# Altium PCB PCB1.PcbDoc
Units mil, origin at the board's own origin, x right, y up, seen from the top; angles counter-clockwise.
Board outline 6000 x 4000 mil, 2 copper layers (Top Layer, Bottom Layer); 46 components, 48 nets, 332 pads, 0 vias.
Unrouted connection lines stored in the file: 133.
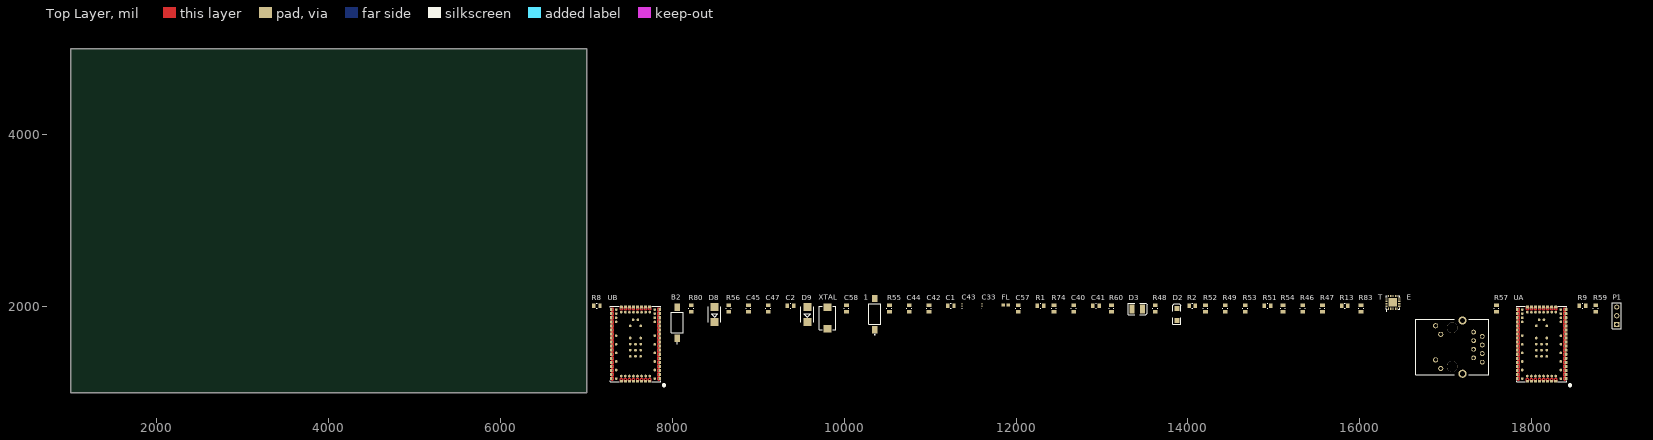
[diagram p0: Top Layer view]
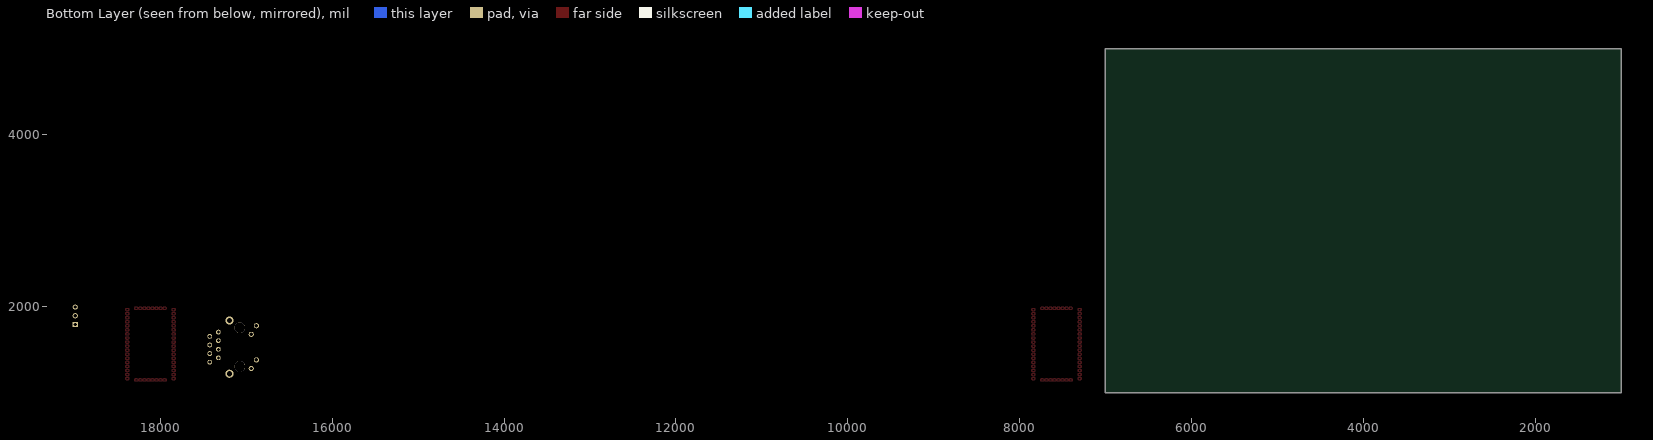
[diagram p1: Bottom Layer view, seen from below]

## Layer stack, top to bottom
Top Solder: solder mask 0.4, Solder Resist, Dk 3.5
Top Layer: signal copper 1.4
Dielectric 1: dielectric 12.6, FR-4, Dk 4.8
Bottom Layer: signal copper 1.4
Bottom Solder: solder mask 0.4, Solder Resist, Dk 3.5

## Board outline
1000,1000 7000,1000 7000,5000 1000,5000

## Design rules (kind name [scope] priority, off if disabled: settings)
Clearance [All] p1: gap=10 ignorepadtopadclearanceinfootprint=FALSE except(0: Arc-Hole Track-Hole SMDPad-Hole THPad-Hole Via-Hole Fill-Hole Poly-Hole Region-Hole Text-Hole)
PolygonConnect [All] p1: connectstyle=Relief reliefconductorwidth=10 reliefentries=4 polygonreliefangle="90 Angle" airgapwidth=10
RoomDefinition Ublox_breakout [InComponentClass('Ublox_breakout')] p1: confinementstyle=ConfineIn formatcopy=TRUE lockcomponents=FALSE outline 7045,1055 19050,1055 19050,2155 7045,2155
RoutingVias [All] p1: holewidth=28 width=50 viastyle="Through Hole" minholewidth=28 minwidth=50 maxholewidth=28 maxwidth=50
SolderMaskExpansion [All] p1: expansion=4 istentingtop=FALSE
Width [All] p1: maxlimit=10 minlimit=10 preferedwidth=10
30 further rules are at their usual default settings.

## Components (designator, comment, footprint, x,y, rotation, side; value= is the part's Value field where it differs from the comment)
1 "push button" TECO-FSMSM 10355,1915 r90 top
B2 "push button" TECO-FSMSM 8055,1815 r90 top
C1 "22uF 10V" 0805 11240,2010 r0 top value=22uF
C2 "22uF 10V" 0805 9375,2010 r0 top value=22uF
C33 "2.2uF" 0603 11600,2020 r90 top
C40 "100nF 50V" 0805 12670,1980 r90 top value=100nF
C41 "100nF 50V" 0805 12930,2010 r0 top value=100nF
C42 "100nF 50V" 0805 10985,1980 r90 top value=100nF
C43 "2.2uF" 0603 11370,2020 r90 top
C44 "100nF 50V" 0805 10755,1980 r90 top value=100nF
C45 "100nF 50V" 0805 8885,1980 r90 top value=100nF
C47 "100nF 50V" 0805 9115,1980 r90 top value=100nF
C57 "100nF 50V" 0805 12025,1980 r90 top value=100nF
C58 "100nF 50V" 0805 10025,1980 r90 top value=100nF
D2 "LED2" 3.2X1.6X1.1 13870,1910 r90 top
D3 "LED3" 3.5X2.8X1.9 13410,1975 r0 top
D8 "SD560BTR" DO-214AA 8490,1910 r90 top
D9 "SD560BTR" DO-214AA 9570,1910 r90 top
E "RJ45" *RJ45_PULSEJACK 17075,1530 r90 top
FL "BLM18PG300SN1D" BEADC1608X95N 11880,2020 r0 top
P1 "Header 3" HDR1X3 18990,1795 r90 top
R1 "270" 0805 12285,2010 r0 top
R2 "270" 0805 14050,2010 r0 top
R8 "JUMPER" 0805 7120,2010 r0 top value=0
R9 "120" 0805 18590,2010 r0 top
R13 "1k" 0805 15825,2010 r0 top
R46 "10.0" 0805 15335,1980 r90 top
R47 "10.0" 0805 15565,1980 r90 top
R48 "10.0" 0805 13620,1980 r90 top
R49 "10.0" 0805 14435,1980 r90 top
R51 "10.0" 0805 14925,2010 r0 top
R52 "10.0" 0805 14205,1980 r90 top
R53 "10.0" 0805 14665,1980 r90 top
R54 "10.0" 0805 15105,1980 r90 top
R55 "1k" 0805 10525,1980 r90 top
R56 "1k" 0805 8655,1980 r90 top
R57 "1k" 0805 17590,1980 r90 top
R59 "1k" 0805 18745,1980 r90 top
R60 "6.8k" 0805 13110,1980 r90 top
R74 "16m" 0805 12440,1980 r90 top
R80 "JUMPER" 0805 8220,1980 r90 top value=0
R83 "4.7" 0805 16015,1980 r90 top
T "KSZ8081RNAIA-TR" QFN50P400X400X90-25N 16385,2050 r90 top
UA "ODIN-W262" ODIN-W262 18115,1565 r90 top
UB "ODIN-W262" ODIN-W262 7570,1565 r90 top
XTAL "CRYSTAL 25.0000MHZ 8PF SMD" SMD-2 9805,1870 r90 top

## Footprints (in the part's own frame and the unit in brackets; to place one, negate y for a bottom-side part, rotate by r counter-clockwise, add the part's x,y. Pads: shape width x height; smd on the part's side, far side on the other; paste and mask are expansions set on the pad)
3.2X1.6X1.1 [mm]
  rect 1.5x1.5 smd: 1(-1.75,0) 2(1.75,0)
  silkscreen extent -2.9,-1.15 3.2,1.15
3.5X2.8X1.9 [mm] "SM LED; 2 C-Bend Leads; Body 3.5 x 2.8 x 1.9 mm, inc leads (LxWxH typ)"
  rect 1.5x2.6 smd: 1(-1.5,0) 2(1.5,0)
  silkscreen extent -2.65,-1.7 2.95,1.7
0603 [mm] "Chip Inductor, Body 0.6x0.3mm, IPC High Density"
  rect 0.5x0.3 smd: 1(-0.35,0) 2(0.35,0)
  silkscreen extent -0.9,-0.05 -0.9,0.05, body extent -0.33,-0.18 0.33,0.18, height 0.55
0805 [mil]
  rect 40x55 smd: 1(-37,0) 2(37,0)
  silkscreen extent -4,-28 4,28
*RJ45_PULSEJACK [mm]
  round 1.408 hole 0.9: 1(4.445,-6.35) 2(3.175,-8.89) 3(1.905,-6.35) 4(0.635,-8.89) 5(-0.635,-6.35) 6(-1.905,-8.89) 7(-3.175,-6.35) 8(-4.445,-8.89)
  round 1.508 hole 1: 9(6.325,4.9) 10(3.785,3.38) 11(-3.785,4.9) 12(-6.325,3.38)
  round 3.2 hole 3.2 unplated: None(-5.715,0) None(5.715,0)
  round 2.4 hole 1.6: P$5(-7.875,-3.05) P$6(7.875,-3.05)
  silkscreen extent -8.13,-10.8 8.2,10.79
BEADC1608X95N [mm]
  rect 1x0.97 smd: 1(-0.735,0) 2(0.735,0)
DO-214AA [mm]
  rect 2.4x2.4 smd: A(2.2,0) C(-2.2,0)
  silkscreen extent -2.26,-1.91 2.26,1.91
HDR1X3 [mm] "Connector; Header; 3 Position"
  rect 1.5x1.5 hole 0.9: 1(0,0)
  round 1.5 hole 0.9: 2(2.54,0) 3(5.08,0)
  silkscreen extent -1.27,-1.27 6.35,1.27
ODIN-W262 [mm]
  round 0.8 smd: 1(6.6,-5.7) 2(7.8,-5.7) 3(9,-5.7) 4(10.2,-5.7) 5(9.45,-4.2) 6(9.45,-3) 7(9.45,-1.8) 8(9.45,-0.6) 9(9.45,0.6) 10(9.45,1.8) 11(9.45,3) 12(9.45,4.2) 13(10.2,5.7) 14(9,5.7) 15(7.8,5.7) 16(6.6,5.7) 17(-9.45,4.2) 18(-9.45,3) 19(-9.45,1.8) 20(-9.45,0.6) 21(-9.45,-0.6) 22(-9.45,-1.8) 23(-9.45,-3) 24(-9.45,-4.2) 25(-3.6,-1.54) 26(-1.8,-1.54) 27(0,-1.54) 28(1.8,-1.54) 29(5.4,-1.54) 30(7.2,-0.7) 31(-3.6,0) 32(-1.8,0) 33(0,0) 34(-3.6,1.54) 35(-1.8,1.54) 36(0,1.54) 37(1.8,1.54) 38(5.4,1.54) 39(7.2,0.7) TP1(2.49,-5.7) TP2(2.49,5.7) TP3(-0.05,-5.7) TP4(-0.05,5.7) TP5(-2.59,-5.7) TP6(-2.59,5.7) TP7(-5.13,-5.7) TP8(-5.13,5.7) TP9(-7.67,-5.7) TP10(-7.67,5.7) TP11(-10.21,-5.7) TP12(-10.21,5.7)
  rrect15% 0.9x0.75 smd paste-1 mask+0: A1(-10.2,-7.225) A2(-9,-7.225) A3(-7.8,-7.225) A4(-6.6,-7.225) A5(-5.4,-7.225) A6(-4.2,-7.225) A7(-3,-7.225) A8(-1.8,-7.225) A9(-0.6,-7.225) A10(0.6,-7.225) A11(1.8,-7.225) A12(3,-7.225) A13(4.2,-7.225) A14(5.4,-7.225) A15(6.6,-7.225) A16(7.8,-7.225) A17(9,-7.225) A18(10.2,-7.225) C1(10.2,7.225) C2(9,7.225) C3(7.8,7.225) C4(6.6,7.225) C5(5.4,7.225) C6(4.2,7.225) C7(3,7.225) C8(1.8,7.225) C9(0.6,7.225) C10(-0.6,7.225) C11(-1.8,7.225) C12(-3,7.225) C13(-4.2,7.225) C14(-5.4,7.225) C15(-6.6,7.225) C16(-7.8,7.225) C17(-9,7.225) C18(-10.2,7.225)
  rrect15% 0.75x0.9 smd paste-1 mask+0: B1(10.975,-4.2) B2(10.975,-3) B3(10.975,-1.8) B4(10.975,-0.6) B5(10.975,0.6) B6(10.975,1.8) B7(10.975,3) B8(10.975,4.2) D1(-10.975,4.2) D2(-10.975,3) D3(-10.975,1.8) D4(-10.975,0.6) D5(-10.975,-0.6) D6(-10.975,-1.8) D7(-10.975,-3) D8(-10.975,-4.2)
  Top Layer circle w0: c-3,-6.85 r0.45
  Top Layer circle w0: c-1.8,-6.85 r0.45
  Top Layer circle w0: c-0.6,-6.85 r0.45
  Top Layer circle w0: c0.6,-6.85 r0.45
  Top Layer circle w0: c1.8,-6.85 r0.45
  Top Layer circle w0: c3,-6.85 r0.45
  Top Layer circle w0: c4.2,-6.85 r0.45
  Top Layer circle w0: c5.4,-6.85 r0.45
  Top Layer circle w0: c6.6,-6.85 r0.45
  Top Layer circle w0: c7.8,-6.85 r0.45
  Top Layer circle w0: c9,-6.85 r0.45
  Top Layer circle w0: c10.2,-6.85 r0.45
  Top Layer circle w0: c-10.2,-6.85 r0.45
  Top Layer circle w0: c-9,-6.85 r0.45
  Top Layer circle w0: c-7.8,-6.85 r0.45
  Top Layer circle w0: c-6.6,-6.85 r0.45
  Top Layer circle w0: c-5.4,-6.85 r0.45
  Top Layer circle w0: c-4.2,-6.85 r0.45
  Top Layer circle w0: c3,6.85 r0.45
  Top Layer circle w0: c1.8,6.85 r0.45
  Top Layer circle w0: c0.6,6.85 r0.45
  Top Layer circle w0: c-0.6,6.85 r0.45
  Top Layer circle w0: c-1.8,6.85 r0.45
  Top Layer circle w0: c-3,6.85 r0.45
  Top Layer circle w0: c-4.2,6.85 r0.45
  Top Layer circle w0: c-5.4,6.85 r0.45
  Top Layer circle w0: c-6.6,6.85 r0.45
  Top Layer circle w0: c-7.8,6.85 r0.45
  Top Layer circle w0: c-9,6.85 r0.45
  Top Layer circle w0: c-10.2,6.85 r0.45
  Top Layer circle w0: c10.2,6.85 r0.45
  Top Layer circle w0: c9,6.85 r0.45
  Top Layer circle w0: c7.8,6.85 r0.45
  Top Layer circle w0: c6.6,6.85 r0.45
  Top Layer circle w0: c5.4,6.85 r0.45
  Top Layer circle w0: c4.2,6.85 r0.45
  Top Layer circle w0: c-10.6,4.2 r0.45
  Top Layer circle w0: c-10.6,3 r0.45
  Top Layer circle w0: c-10.6,1.8 r0.45
  Top Layer circle w0: c-10.6,0.6 r0.45
  Top Layer circle w0: c-10.6,-0.6 r0.45
  Top Layer circle w0: c-10.6,-1.8 r0.45
  Top Layer circle w0: c-10.6,-3 r0.45
  Top Layer circle w0: c-10.6,-4.2 r0.45
  Top Layer circle w0: c10.6,-4.2 r0.45
  Top Layer circle w0: c10.6,-3 r0.45
  Top Layer circle w0: c10.6,-1.8 r0.45
  Top Layer circle w0: c10.6,-0.6 r0.45
  Top Layer circle w0: c10.6,0.6 r0.45
  Top Layer circle w0: c10.6,1.8 r0.45
  Top Layer circle w0: c10.6,3 r0.45
  Top Layer circle w0: c10.6,4.2 r0.45
  silkscreen extent -12.4,-8.65 11.15,7.4, body extent -11.15,-7.4 11.15,7.4, height 4.8
QFN50P400X400X90-25N [mm]
  rrect70% 0.71x0.27 smd: 1(-1.9,1.25) 2(-1.9,0.75) 3(-1.9,0.25) 4(-1.9,-0.25) 5(-1.9,-0.75) 6(-1.9,-1.25) 13(1.9,-1.25) 14(1.9,-0.75) 15(1.9,-0.25) 16(1.9,0.25) 17(1.9,0.75) 18(1.9,1.25)
  rrect70% 0.27x0.71 smd: 7(-1.25,-1.9) 8(-0.75,-1.9) 9(-0.25,-1.9) 10(0.25,-1.9) 11(0.75,-1.9) 12(1.25,-1.9) 19(1.25,1.9) 20(0.75,1.9) 21(0.25,1.9) 22(-0.25,1.9) 23(-0.75,1.9) 24(-1.25,1.9)
  rect 2.5x2.5 smd paste-2: 25(0,0)
  silkscreen extent -2.55,-2 2,2
SMD-2 [mm]
  rect 2.2x2.4 smd: 1(-3.15,0) 2(3.15,0)
  silkscreen extent -3.5,-2.5 3.5,2.5
TECO-FSMSM [mm]
  rect 2.19x1.6 smd: 1(-4.59,0) 2(4.59,0)
  silkscreen extent -6.2,-1.75 3,1.75

## Part data
1 B2: library part Teco-FSMSM
C1 C2: library part "CAP 22uF 10V", "CAP CER 2.2UF 10V X5R 0805", Operating Temperature="-55°C ~ 85°C", Package=0805, Rating=10V, Temperature Coefficient=X5R, Tolerance=20%
C33 C43: library part "CAP 2.2uF 6.3V", "CAP CER 2.2UF 6.3V X5R 0603/0805", Operating Temperature="-55°C ~ 85°C", Package=0603/0805, Rating=6.3V, Temperature Coefficient=X5R, Tolerance=10%
C40 C41 C42 C44 C45 C47 C57 C58: library part "CAP 100nF 50V", "CAP CER 0.1UF 50V X7R 0805", Package=0805, Rating=50V, Tolerance=10%
D2: library part "LED RED SMD", "Typical RED, GREEN, YELLOW, AMBER GaAs LED", Color=Red, Current - Test=20mA, Lens Color=Colorless, Package=1206, Voltage - Forward (Vf) (Typ)=1.7V, Lens Transparency=Clear
D3: "Typical BLUE SiC LED", DatasheetVersion=16-Apr-2002, LatestRevisionDate=17-Dec-2003, LatestRevisionNote="PCB Footprint replaced.", PackageDescription="SM LED; 2 C-Bend Leads; Body 3.5 x 2.8 x 1.9 mm, inc leads (LxWxH typ)", PackageReference=3.5X2.8X1.9, PackageVersion=16-Apr-2002, Published=8-Jun-2000, Publisher="Altium Limited"
D8 D9: library part "DIODE STANDARD 600V 5A", "Diode Standard 600V 5A Surface Mount SMB", Supplier Part Number 1=1655-1530-1-ND, Supplier 1=Digi-Key
E: "Jack Modular Connector 8p8c (RJ45, Ethernet) 90Â° Angle (Right) Unshielded", Package=None, Availability=Unavailable, Check_prices=https://www.snapeda.com/parts/RJ45/Bulgin/view-part/55901/?ref=eda, MF=Bulgin, MP=RJ45, Price=None, SnapEDA_Link=https://www.snapeda.com/parts/RJ45/Bulgin/view-part/55901/?ref=snap
FL: "30 Ohms @ 100MHz 1 Power Line Ferrite Bead 0603 _1608 Metric_ 1A 50mOhm", Package="1608 Murata", Availability=Unavailable, MF=Murata, MP=BLM18PG300SN1D, Price=None, SnapEDA_Link=https://www.snapeda.com/parts/BLM18PG300SN1D/Murata/view-part/270173/?ref=snap
P1: "Header, 3-Pin", LatestRevisionDate=17-Jul-2002, LatestRevisionNote="Re-released for DXP Platform.", Publisher="Altium Limited"
R1 R2: library part "RES 270 1/8W", "RES SMD 270 OHM 5% 1/8W 0805", Package=0805, Power (Watts)=0.125W, Tolerance=5%
R8 R80: library part "RES 0 JUMPER", "RES SMD 0 OHM JUMPER GENERIC 0805", Package=0805
R9: library part "RES 120.0 1/8W", "RES SMD 120 OHM 5% 1/8W 0805", Package=0805, Power (Watts)=0.125W, Tolerance=5%
R13 R55 R56 R57 R59: library part "RES 1k 1/8W", "RES SMD 1K OHM 5% 1/8W 0805", Package=0805, Power (Watts)=0.125W, Tolerance=5%
R46 R47 R48 R49 R51 R52 R53 R54: library part "RES 10.0 1/8W - 5%", "RES SMD 10.0 OHM 5% 1/8W 0805", Package=0805, Power (Watts)=0.125W, Tolerance=5%
R60: library part "RES 6.8k 1/8W", "RES SMD 6.8K OHM 5% 1/8W 0805", Package=0805, Power (Watts)=0.125W, Tolerance=5%
R74: library part "RES 16m 1/2W", "RES SMD 0.016 OHM 1% 1/2W 0805 Thick Film", Case Code (Imperial)=0805, Case Code (Metric)=2012, Manufacturer=Panasonic, Manufacturer Part Number=ERJ-6BWFR016V, Max Operating Temperature=155°C, Max Power Dissipation=500mW, Min Operating Temperature=-55°C, Package Quantity=1, Resistance=16mR, Supplier Part Number 1=P.016AQCT-ND, Temperature Coefficient=200ppm/°C, Tolerance=1%, Case/Package=0805, Category="Chip SMD Resistors", ComponentLink1Description=https://datasheet.ciiva.com/11808/0900766b8126441d-11808690.pdf?src-supplier=RSComponents, ComponentLink1URL=https://datasheet.ciiva.com/11808/0900766b8126441d-11808690.pdf?src-supplier=RSComponents, ComponentLink2Description=https://datasheet.ciiva.com/2452/aoa0000ce3-2452594.pdf?src-supplier=Digi-Key, ComponentLink2URL=https://datasheet.ciiva.com/2452/aoa0000ce3-2452594.pdf?src-supplier=Digi-Key, ComponentLink3Description=https://datasheet.ciiva.com/2452/aoa0000ce3-2452592.pdf?src-supplier=Digi-Key, ComponentLink3URL=https://datasheet.ciiva.com/2452/aoa0000ce3-2452592.pdf?src-supplier=Digi-Key, ComponentLink4Description=https://datasheet.ciiva.com/2452/aoa0000ce3-2452593.pdf?src-supplier=Digi-Key, ComponentLink4URL=https://datasheet.ciiva.com/2452/aoa0000ce3-2452593.pdf?src-supplier=Digi-Key, ComponentLink5Description=https://datasheet.ciiva.com/9192/aoa0000ce3-9192761.pdf?src-supplier=Avnet, ComponentLink5URL=https://datasheet.ciiva.com/9192/aoa0000ce3-9192761.pdf?src-supplier=Avnet, ComponentLink6Description=https://datasheet.ciiva.com/17211/aoa0000ce3-17211370.pdf?src-supplier=Avnet+Europe, ComponentLink6URL=https://datasheet.ciiva.com/17211/aoa0000ce3-17211370.pdf?src-supplier=Avnet+Europe, Composition="Thick Film", Contact Plating=Tin, Depth=1.25mm, Features="Automotive AEC-Q200", Height=0.028inch, Lead Free="Lead Free", Length=2mm, Military Standard=Not, Mount="Surface Mount", Number of Pins=2, Number of Terminations=2, Packaging="Tape and Reel", Power Rating=500mW, Pricing 1="1=0.65000, 10=0.53800, 100=0.36140, 1000=0.21148, 2500=0.20917 (USD)", Radiation Hardening=No, RoHS=Yes, Stock 1=4585, Supplier 1=Digi-Key, Termination=SMD/SMT, Width=0.049inch
R83: library part "RES 4.7 1/8W", "RES SMD 4.7 OHM 5% 1/8W 0805", Package=0805, Power (Watts)=0.125W, Tolerance=5%
T: "1/1 Transceiver Full RMII 24-QFN _4x4_", Package="QFN-24 Microchip", Availability=Unavailable, MF=Microchip, MP=KSZ8081RNAIA-TR, Price=None, SnapEDA_Link=https://www.snapeda.com/parts/KSZ8081RNAIA-TR/Microchip/view-part/482545/?ref=snap
XTAL: library part "XTAL 25MHZ 8PF SMD", "25MHz ±50ppm Crystal 8pF 70 Ohms 2-SMD, No Lead", Frequency=25MHz, Load Capacitance=8pF, Package="2-SMD, No Lead", Supplier Part Number 1=644-1041-1-ND, Digikey=644-1041-1-ND, Digikey Link=https://www.digikey.ca/product-detail/en/ndk-america-inc/NX5032GA-25.000000MHZ-LN-CD-1/644-1041-1-ND/1128913, ESR="70 Ohms", MF="NDK America, Inc.", MP=NX5032GA-25.000000MHZ-LN-CD-1, Price="0.95 CAD", Supplier 1=Digi-Key

## Nets (pads, with @x,y where several pads share a name; then routed paths per layer and width w, separated by ;. In a path a pad name is that pad's centre, name@x,y a point inside that pad or via, vN(x,y) a via of type N, cw(c..) or ccw(c..) an arc to the next point about the centre after c; other vN are vias at no path point)
1v8: C33.1 C42.2 D9.C R13.2 R55.2 R59.1 T.14
3.3V: UB.A4
3v3: C41.2 E.6 E.9 FL.2 R57.1 R83.1
BlueLED: D3.1 UA.A9
ETH_CRSDV: R54.2 R57.2 UA.D4
ETH_MC: R46.1 T.11
ETH_MDIO: R47.1 R83.2 T.10
ETH_REFCLK: T.16 UA.D8
ETH_RST_N: D8.C R8.1 R80.1
ETH_RXD0: R52.2 UA.D5
ETH_RXD1: R53.2 UA.D6
ETH_TXD0: R49.1 UA.D1
ETH_TXD1: R51.1 UA.D2
ETH_TXEN: R48.1 UA.D3
GND: 1.2 B2.2 C1.2 C2.2 C33.2 C40.1 C41.1 C42.1 C43.2 C44.1 C45.1 C47.1 C57.2 C58.2 R1.1 R2.1 R8.2 R56.2 R60.1 R74.1 T.22 T.25 UA.A10 UB.1 UB.2 UB.3 UB.4 UB.5 UB.6 UB.7 UB.8 UB.9 UB.10 UB.11 UB.12 UB.13 UB.14 UB.15 UB.16 UB.17 UB.18 UB.19 UB.20 UB.21 UB.22 UB.23 UB.24 UB.25 UB.26 UB.27 UB.28 UB.29 UB.30 UB.31 UB.32 UB.33 UB.34 UB.35 UB.36 UB.37 UB.38 UB.39 UB.A3 UB.C1 UB.C3 UB.C4 UB.C7 UB.D7
MAIN_RESET: P1.1 R80.2 UA.A1
NetC2_1: C2.1 T.8
NetC40_2: C40.2 E.3
NetC43_1: C43.1 C44.2 FL.1 T.2
NetC45_2: C45.2 C47.2 T.1
NetC57_1: C57.1 C58.1 E.4 E.5 R74.2
NetD2_1: D2.1 UA.A8
NetD2_2: D2.2 R2.2
NetD3_2: D3.2 R1.2
NetD8_A: D8.A D9.A R55.1 T.24
NetE_10: E.10 R9.1
NetP1_2: P1.2 UA.A13
NetR9_2: R9.2
NetR13_1: R13.1 T.18
NetR46_2: R46.2 UA.C14
NetR47_2: R47.2 UA.C15
NetR48_2: R48.2 T.19
NetR49_2: R49.2 T.20
NetR51_2: R51.2 T.21
NetR52_1: R52.1 T.13
NetR53_1: R53.1 T.12
NetR54_1: R54.1 T.15
NetR56_1: R56.1 T.17
NetR60_2: R60.2 T.9
NetT_7: T.7 XTAL.2
PHY_LED0: R59.2 T.23
PHY_RXN: E.8 T.3
PHY_RXP: E.7 T.4
PHY_TXN: E.2 T.5
PHY_TXP: E.1 T.6
RedLED: 1.1 UA.A7
SWITCH0: B2.1 UA.A6
UART_TXD: P1.3 UA.A11
pads on no net: C1.1 E.11 E.12 E.None E.P$5 E.P$6 UA.1 UA.2 UA.3 UA.4 UA.5 UA.6 UA.7 UA.8 UA.9 UA.10 UA.11 UA.12 UA.13 UA.14 UA.15 UA.16 UA.17 UA.18 UA.19 UA.20 UA.21 UA.22 UA.23 UA.24 UA.25 UA.26 UA.27 UA.28 UA.29 UA.30 UA.31 UA.32 UA.33 UA.34 UA.35 UA.36 UA.37 UA.38 UA.39 UA.A2 UA.A3 UA.A4 UA.A5 UA.A12 UA.A14 UA.A15 UA.A16 UA.A17 UA.A18 UA.B1 UA.B2 UA.B3 UA.B4 UA.B5 UA.B6 UA.B7 UA.B8 UA.C1 UA.C2 UA.C3 UA.C4 UA.C5 UA.C6 UA.C7 UA.C8 UA.C9 UA.C10 UA.C11 UA.C12 UA.C13 UA.C16 UA.C17 UA.C18 UA.D7 UA.TP1 UA.TP2 UA.TP3 UA.TP4 UA.TP5 UA.TP6 UA.TP7 UA.TP8 UA.TP9 UA.TP10 UA.TP11 UA.TP12 UB.A1 UB.A2 UB.A5 UB.A6 UB.A7 UB.A8 UB.A9 UB.A10 UB.A11 UB.A12 UB.A13 UB.A14 UB.A15 UB.A16 UB.A17 UB.A18 UB.B1 UB.B2 UB.B3 UB.B4 UB.B5 UB.B6 UB.B7 UB.B8 UB.C2 UB.C5 UB.C6 UB.C8 UB.C9 UB.C10 UB.C11 UB.C12 UB.C13 UB.C14 UB.C15 UB.C16 UB.C17 UB.C18 UB.D1 UB.D2 UB.D3 UB.D4 UB.D5 UB.D6 UB.D8 UB.TP1 UB.TP2 UB.TP3 UB.TP4 UB.TP5 UB.TP6 UB.TP7 UB.TP8 UB.TP9 UB.TP10 UB.TP11 UB.TP12 XTAL.1

## Text inside footprints (layer, text, board x,y; h text height)
E: Mechanical 4 "NO TRACE ZONE" at 16734.84,1300 h73.82 r90; Mechanical 4 "NO TRACE ZONE" at 16734.84,1300 h73.82 r90